# Altium PCB OPENMV4_BASE_ascii.PcbDoc
Units mm, origin at the board's own origin, x right, y up, seen from the top; angles counter-clockwise.
Board outline 35 x 44.63 mm, 2 copper layers (Top Layer, Bottom Layer); 53 components, 65 nets, 319 pads, 175 vias.
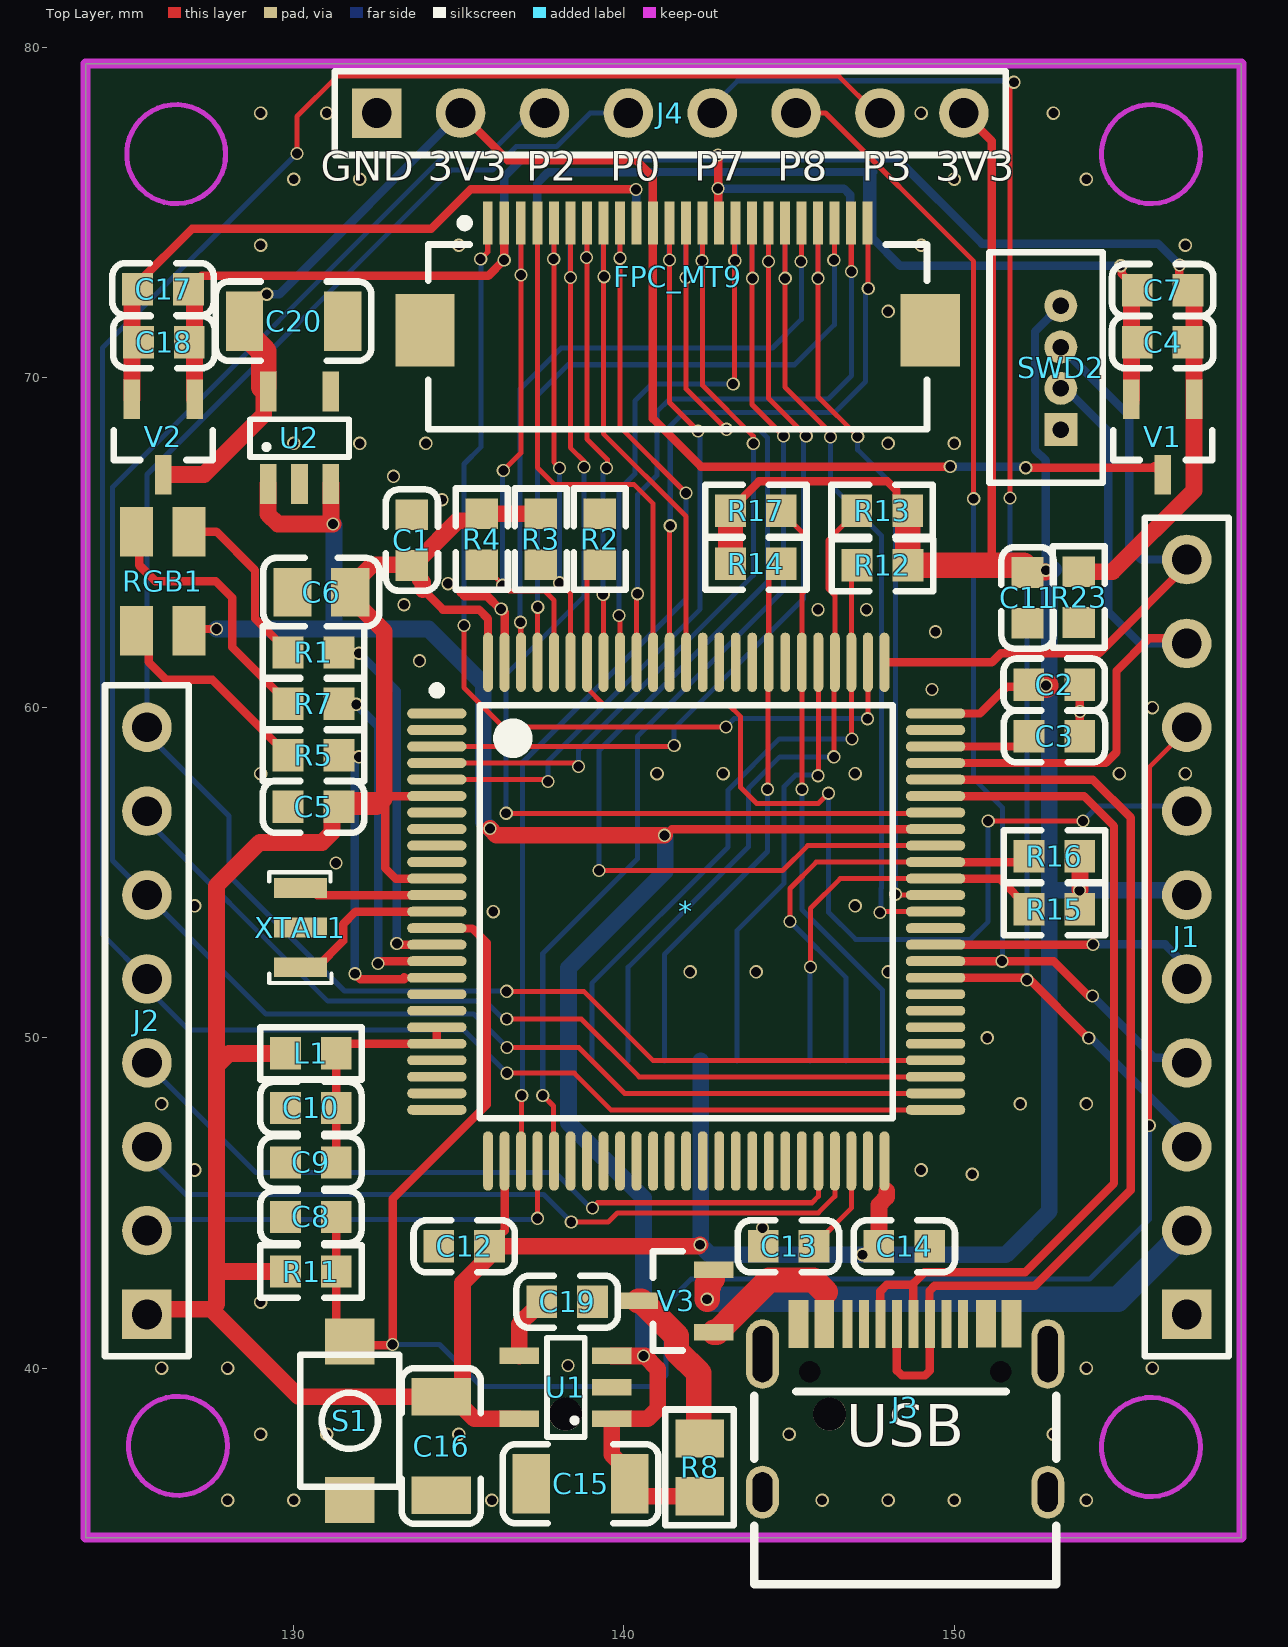
[diagram p0: Top Layer view]
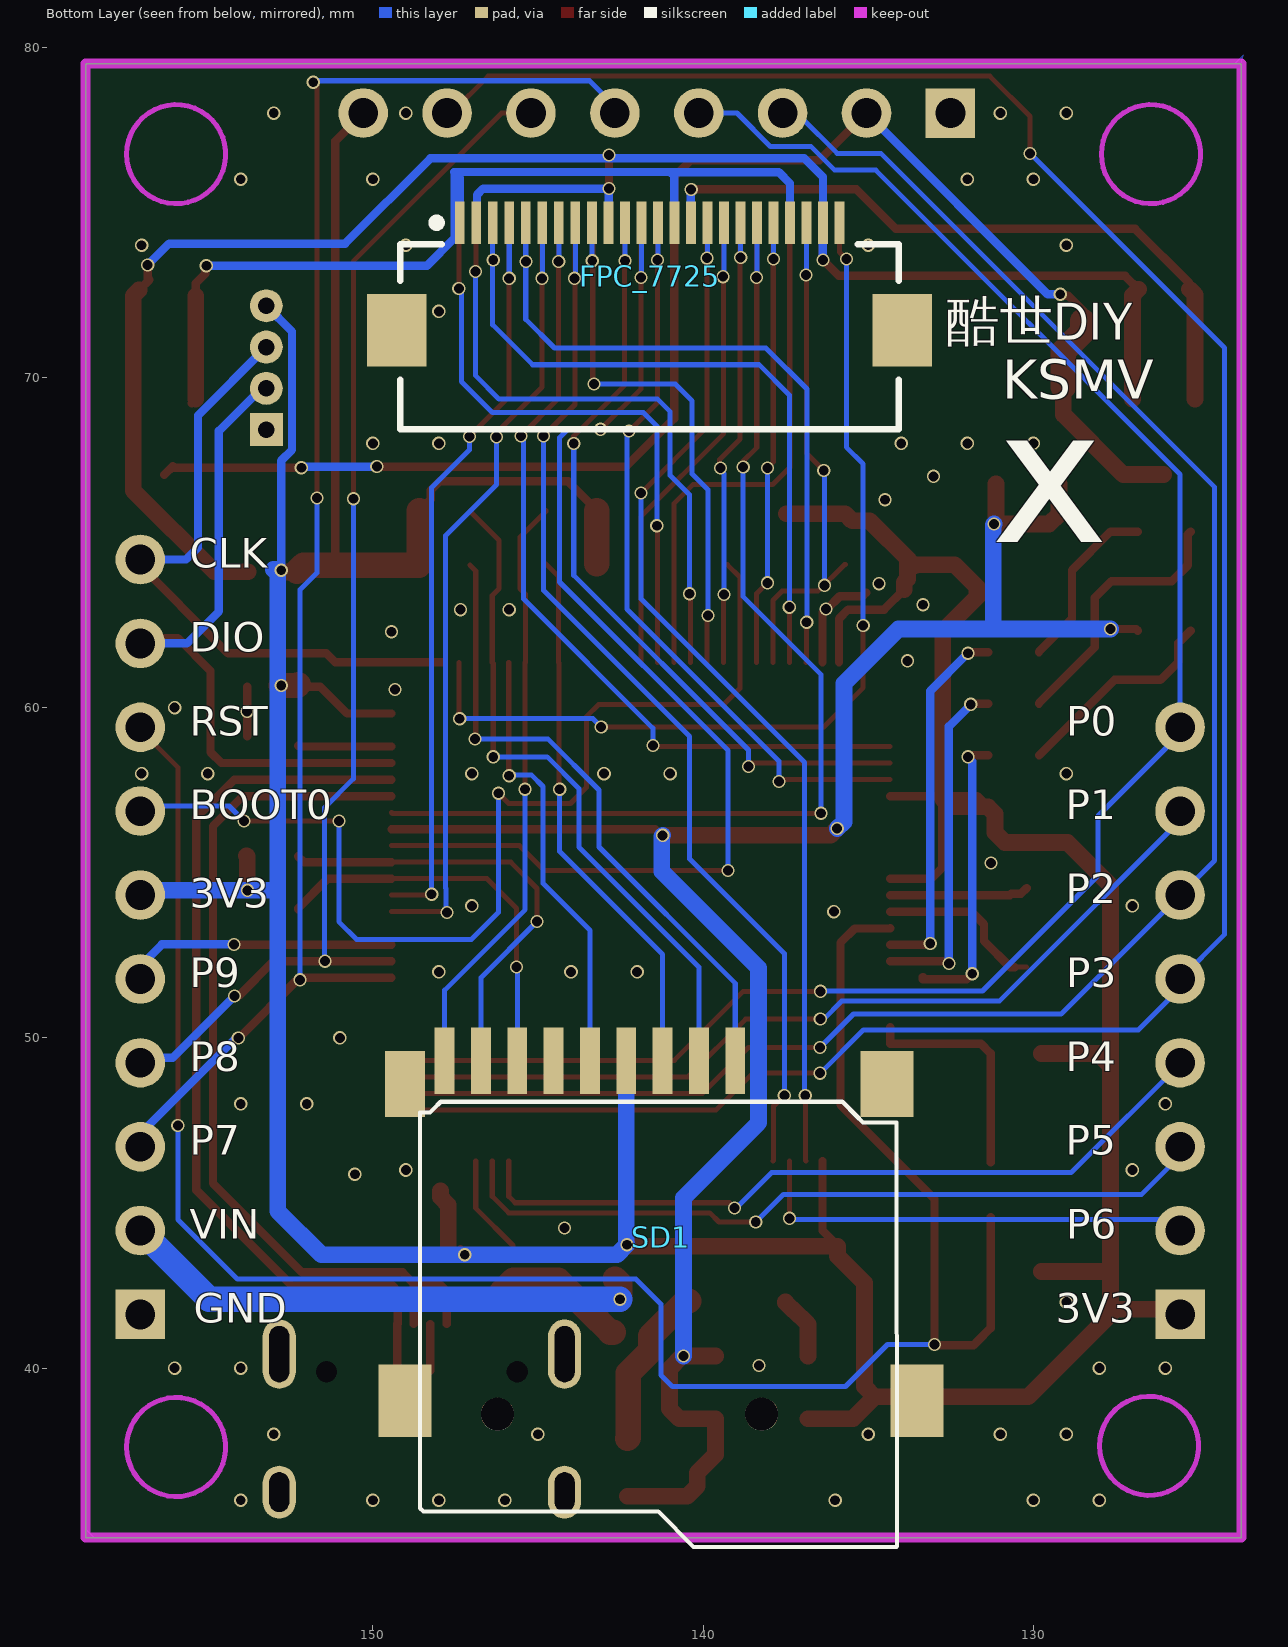
[diagram p1: Bottom Layer view, seen from below]

## Layer stack, top to bottom
Top Solder: solder mask 0.0102, Solder Resist, Dk 3.5
Top Layer: signal copper 0.0356
Dielectric 1: dielectric 0.32, FR-4, Dk 4.8
Bottom Layer: signal copper 0.0356
Bottom Solder: solder mask 0.0102, Solder Resist, Dk 3.5

## Board outline
123.698,34.869 158.698,34.869 158.698,79.502 123.698,79.502

## Design rules (kind name [scope] priority, off if disabled: settings)
AssemblyTestPointUsage [All] p0: scope1count=1 scope1_0_kind=Board scope1_0_value=Board scope2count=1 scope2_0_kind=Board scope2_0_value=Board commentlength=0
AssemblyTestpoint [All] p0: scope1count=1 scope1_0_kind=Board scope1_0_value=Board scope2count=1 scope2_0_kind=Board scope2_0_value=Board commentlength=0
Clearance [All] p0: scope1count=1 scope1_0_kind=Board scope1_0_value=Board scope2count=1 scope2_0_kind=Board scope2_0_value=Board commentlength=0 gap=0.152
Clearance [All] p1: gap=0.152 ignorepadtopadclearanceinfootprint=FALSE except(0: Arc-Hole Track-Hole SMDPad-Hole THPad-Hole Via-Hole Fill-Hole Poly-Hole Region-Hole Text-Hole)
ComponentClearance [All] p0: scope1count=1 scope1_0_kind=Board scope1_0_value=Board scope2count=1 scope2_0_kind=Board scope2_0_value=Board commentlength=0 gap=0.254 collisioncheckmode=3
DiffPairsRouting [All] p0: scope1count=1 scope1_0_kind=Board scope1_0_value=Board scope2count=1 scope2_0_kind=Board scope2_0_value=Board commentlength=0
FabricationTestPointUsage [All] p0: scope1count=1 scope1_0_kind=Board scope1_0_value=Board scope2count=1 scope2_0_kind=Board scope2_0_value=Board commentlength=0 valid=0 allowmultiple=FALSE
FabricationTestpoint [All] p0: scope1count=1 scope1_0_kind=Board scope1_0_value=Board scope2count=1 scope2_0_kind=Board scope2_0_value=Board commentlength=0 side=3 testpointundercomponent=TRUE minsize=1.016 maxsize=2.54 preferedsize=1.524 minholesize=0 maxholesize=1.016 preferedholesize=0.813 testpointgrid=0.025
FanoutControl Fanout_BGA [All] p0 off: scope1count=1 scope1_0_kind=Board scope1_0_value=Board scope2count=1 scope2_0_kind=Board scope2_0_value=Board commentlength=69 // Protel DXP Scope 1 Expression Was: IsBGA   Fanout_BGA (Default Rule)
FanoutControl Fanout_LCC [All] p0 off: scope1count=1 scope1_0_kind=Board scope1_0_value=Board scope2count=1 scope2_0_kind=Board scope2_0_value=Board commentlength=69 // Protel DXP Scope 1 Expression Was: IsLCC   Fanout_LCC (Default Rule)
FanoutControl Fanout_SOIC [All] p0 off: scope1count=1 scope1_0_kind=Board scope1_0_value=Board scope2count=1 scope2_0_kind=Board scope2_0_value=Board commentlength=71 // Protel DXP Scope 1 Expression Was: IsSOIC   Fanout_SOIC (Default Rule)
FanoutControl Fanout_Small [All] p0 off: scope1count=1 scope1_0_kind=Board scope1_0_value=Board scope2count=1 scope2_0_kind=Board scope2_0_value=Board commentlength=84 // Protel DXP Scope 1 Expression Was: (CompPinCount < 5)   Fanout_Small (Default Rule)
FanoutControl Fanout_Default [All] p0: scope1count=1 scope1_0_kind=Board scope1_0_value=Board scope2count=1 scope2_0_kind=Board scope2_0_value=Board commentlength=30 // Fanout_Default (Default Rule)
Height [All] p0: scope1count=1 scope1_0_kind=Board scope1_0_value=Board scope2count=1 scope2_0_kind=Board scope2_0_value=Board commentlength=0
HoleSize [All] p0: scope1count=1 scope1_0_kind=Board scope1_0_value=Board scope2count=1 scope2_0_kind=Board scope2_0_value=Board commentlength=0 absolutevalues=TRUE maxlimit=2.54 minlimit=0.025 maxpercent=80.000 minpercent=20.000
HoleToHoleClearance [All] p0: scope1count=1 scope1_0_kind=Board scope1_0_value=Board scope2count=1 scope2_0_kind=Board scope2_0_value=Board commentlength=0
LayerPairs [All] p0: scope1count=1 scope1_0_kind=Board scope1_0_value=Board scope2count=1 scope2_0_kind=Board scope2_0_value=Board commentlength=0 enforce=TRUE
MinimumSolderMaskSliver [All] p0: scope1count=1 scope1_0_kind=Board scope1_0_value=Board scope2count=1 scope2_0_kind=Board scope2_0_value=Board commentlength=0
NetAntennae [All] p0: scope1count=1 scope1_0_kind=Board scope1_0_value=Board scope2count=1 scope2_0_kind=Board scope2_0_value=Board commentlength=0
PasteMaskExpansion [All] p0: scope1count=1 scope1_0_kind=Board scope1_0_value=Board scope2count=1 scope2_0_kind=Board scope2_0_value=Board commentlength=0 expansion=0
PlaneClearance [All] p0: scope1count=1 scope1_0_kind=Board scope1_0_value=Board scope2count=1 scope2_0_kind=Board scope2_0_value=Board commentlength=0 clearance=0.508
PlaneConnect [All] p0: scope1count=1 scope1_0_kind=Board scope1_0_value=Board scope2count=1 scope2_0_kind=Board scope2_0_value=Board commentlength=0 planeconnectstyle=Relief reliefexpansion=0.508 reliefentries=4 reliefconductorwidth=0.254 reliefairgap=0.254
PolygonConnect [All] p0: scope1count=1 scope1_0_kind=Board scope1_0_value=Board scope2count=1 scope2_0_kind=Board scope2_0_value=Board commentlength=0 connectstyle=Relief reliefconductorwidth=0.254 reliefentries=4 polygonreliefangle="90 Angle"
PolygonConnect [All] p1: connectstyle=Relief reliefconductorwidth=0.254 reliefentries=4 polygonreliefangle="90 Angle" airgapwidth=0.254
RoutingCorners [All] p0: scope1count=1 scope1_0_kind=Board scope1_0_value=Board scope2count=1 scope2_0_kind=Board scope2_0_value=Board commentlength=0 cornerstyle=45-Degree minsetback=2.54 maxsetback=2.54
RoutingLayers [All] p0: scope1count=1 scope1_0_kind=Board scope1_0_value=Board scope2count=1 scope2_0_kind=Board scope2_0_value=Board commentlength=0 top layer=Automatic bottom layer=Automatic
RoutingPriority [All] p0: scope1count=1 scope1_0_kind=Board scope1_0_value=Board scope2count=1 scope2_0_kind=Board scope2_0_value=Board commentlength=0
RoutingTopology [All] p0: scope1count=1 scope1_0_kind=Board scope1_0_value=Board scope2count=1 scope2_0_kind=Board scope2_0_value=Board commentlength=0 topology=Shortest
RoutingVias [All] p0: scope1count=1 scope1_0_kind=Board scope1_0_value=Board scope2count=1 scope2_0_kind=Board scope2_0_value=Board commentlength=0 holewidth=0.3 width=0.4 viastyle="Through Hole" minholewidth=0.3 minwidth=0.4 maxholewidth=0.3 maxwidth=0.4
RoutingVias [All] p1: holewidth=0.3 width=0.4 viastyle="Through Hole" minholewidth=0.3 minwidth=0.4 maxholewidth=0.3 maxwidth=0.4
ShortCircuit [All] p0: scope1count=1 scope1_0_kind=Board scope1_0_value=Board scope2count=1 scope2_0_kind=Board scope2_0_value=Board commentlength=0 allowed=FALSE
SilkToBoardRegionClearance [All] p0: scope1count=1 scope1_0_kind=Board scope1_0_value=Board scope2count=1 scope2_0_kind=Board scope2_0_value=Board commentlength=0
SilkToSilkClearance [All] p0: scope1count=1 scope1_0_kind=Board scope1_0_value=Board scope2count=1 scope2_0_kind=Board scope2_0_value=Board commentlength=0
SilkToSolderMaskClearance [All] p0 off: scope1count=1 scope1_0_kind=Board scope1_0_value=Board scope2count=1 scope2_0_kind=Board scope2_0_value=Board commentlength=44 // Protel DXP Scope 1 Expression Was: IsPad
SolderMaskExpansion [All] p0: scope1count=1 scope1_0_kind=Board scope1_0_value=Board scope2count=1 scope2_0_kind=Board scope2_0_value=Board commentlength=0 expansion=0.102
SolderMaskExpansion [All] p1: expansion=0.102 istentingtop=FALSE
UnRoutedNet [All] p0: scope1count=1 scope1_0_kind=Board scope1_0_value=Board scope2count=1 scope2_0_kind=Board scope2_0_value=Board commentlength=0
UnpouredPolygon [All] p0: scope1count=1 scope1_0_kind=Board scope1_0_value=Board scope2count=1 scope2_0_kind=Board scope2_0_value=Board commentlength=0
Width [All] p0: scope1count=1 scope1_0_kind=Board scope1_0_value=Board scope2count=1 scope2_0_kind=Board scope2_0_value=Board commentlength=0 maxlimit=0.762 minlimit=0.152 preferedwidth=0.254
Width [All] p1: maxlimit=0.762 minlimit=0.152 preferedwidth=0.254
30 further rules are at their usual default settings.

## Components (designator, comment, footprint, x,y, rotation, side; value= is the part's Value field where it differs from the comment)
* "STM32H743VIT6" "LQFP100 14x14_N" 141.884,53.823 r270 top
C1 "104" LC-0603_C 133.579,65.075 r270 top
C2 "104" LC-0603_C 153.028,60.697 r180 top
C3 "2.2uf" LC-0603_C 153.035,59.131 r0 top
C4 "104" 0603_C 156.312,71.069 r0 top
C5 "104" LC-0603_C 130.598,56.998 r0 top
C6 "10uF" LC-0805_C 130.835,63.5 r0 top
C7 "106" 0603_C 156.312,72.644 r0 top
C8 "104" LC-0603_C 130.522,44.577 r0 top
C9 "104" LC-0603_C 130.522,46.228 r180 top
C10 "10uF" LC-0603_C 130.522,47.879 r180 top
C11 "104" LC-0603_C 152.22,63.322 r90 top
C12 "104" LC-0603_C 135.161,43.688 r0 top
C13 "2.2uf" LC-0603_C 144.983,43.688 r180 top
C14 "104" LC-0603_C 148.488,43.688 r180 top
C15 "47uF" LC-1206_C 138.684,36.5 r180 top
C16 "47uF" LC-1206_C 134.468,37.643 r270 top
C17 "104" 0603_C 126.043,72.669 r0 top
C18 "106" 0603_C 126.068,71.069 r0 top
C19 "104" LC-0603_C 138.278,42.012 r180 top
C20 "47uF" LC-1206_C 129.997,71.704 r0 top
FPC_7725 "FPC_24" FPC_24 141.63,71.323 r180 bottom
FPC_MT9 "FPC_24" FPC_24 141.615,71.316 r0 top
J1 "CON10" HDR1X10 157.041,41.626 r90 top
J2 "CON8" HDR1X8 125.556,41.626 r90 top
J3 "USB type C" "USB Type-C-16Pin_A" 148.514,36.246 r0 top
J4 "Header 10" HDR1X8 132.512,78.003 r0 top
L1 "180nH" LC-0603_L 130.522,49.53 r0 top
R1 "1K" 0603_R 130.598,61.672 r0 top
R2 "10K" LC-0603_R 139.268,65.1 r90 top
R3 "10K" LC-0603_R 137.482,65.1 r90 top
R4 "10K" LC-0603_R 135.695,65.1 r270 top
R5 "1K" 0603_R 130.598,58.556 r180 top
R7 "1K" 0603_R 130.598,60.114 r180 top
R8 "1A保险丝" LC-0805_L 142.291,36.994 r90 top
R11 "10K" LC-0603_R 130.522,42.926 r0 top
R12 "10K" LC-0603_R 147.828,64.313 r180 top
R13 "10K" LC-0603_R 147.82,65.964 r180 top
R14 "10K" LC-0603_R 143.993,64.355 r0 top
R15 "10K" LC-0603_R 153.035,53.899 r180 top
R16 "10K" LC-0603_R 153.035,55.499 r180 top
R17 "10K" LC-0603_R 143.993,65.964 r0 top
R23 "0" LC-0603_R 153.772,63.348 r90 top
RGB1 "RGB_LED" LED_3528_RGB 126.035,63.83 r270 top
S1 "RST" KEY_1 131.699,38.405 r90 top
SD1 "micro SD" TF卡座 141.532,41.942 r270 bottom
SWD2 "Header 4" "SIP 1.25" 153.202,70.294 r90 top (schematic designator SWD1)
U1 "MIC5219" SOT23-5N 138.227,39.421 r90 top
U2 "MIC5219" SOT23-5N 130.175,68.174 r0 top
V1 "XC6206 2V8" SOT23-3N 156.312,68.199 r180 top
V2 "XC6206 1V5" SOT23-3N 126.053,68.199 r180 top
V3 "BAT54C" SOT23-3N 141.58,42.037 r90 top
XTAL1 "12M" XTAL-3215-3P 130.2,53.34 r270 top

## Footprints (in the part's own frame and the unit in brackets; to place one, negate y for a bottom-side part, rotate by r counter-clockwise, add the part's x,y. Pads: shape width x height; smd on the part's side, far side on the other; paste and mask are expansions set on the pad)
0603_C [mm]
  rect 0.93x0.98 smd: 1(-0.77,0) 2(0.77,0)
  silkscreen extent -1.53,-0.79 1.54,0.79
0603_R [mm]
  rect 0.93x0.98 smd: 1(-0.77,0) 2(0.77,0)
  silkscreen extent -1.53,-0.79 1.54,0.79
FPC_24 [mm]
  rect 0.3x1.3 smd: 1(-5.739,3.359) 2(-5.239,3.359) 3(-4.739,3.359) 4(-4.239,3.359) 5(-3.739,3.359) 6(-3.239,3.359) 7(-2.739,3.359) 8(-2.239,3.359) 9(-1.739,3.359) 10(-1.239,3.359) 11(-0.739,3.359) 12(-0.239,3.359) 13(0.261,3.359) 14(0.761,3.359) 15(1.261,3.359) 16(1.761,3.359) 17(2.261,3.359) 18(2.761,3.359) 19(3.261,3.359) 20(3.761,3.359) 21(4.261,3.359) 22(4.761,3.359) 23(5.261,3.359) 24(5.761,3.359)
  rect 1.8x2.2 smd: 25(-7.639,0.109) 26(7.661,0.109)
  silkscreen extent -7.54,-2.89 7.56,3.48
HDR1X8 [mm] "Connector; Header; 8 Position"
  rect 1.5x1.5 hole 0.9: 1(0,0)
  round 1.5 hole 0.9: 2(2.54,0) 3(5.08,0) 4(7.62,0) 5(10.16,0) 6(12.7,0) 7(15.24,0) 8(17.78,0)
  silkscreen extent -1.27,-1.27 19.05,1.27
HDR1X10 [mm] "Connector; Header; 10 Position"
  rect 1.5x1.5 hole 0.9: 1(0,0)
  round 1.5 hole 0.9: 2(2.54,0) 3(5.08,0) 4(7.62,0) 5(10.16,0) 6(12.7,0) 7(15.24,0) 8(17.78,0) 9(20.32,0) 10(22.86,0)
  silkscreen extent -1.27,-1.27 24.13,1.27
KEY_1 [mm]
  rect 1.4x1.5 smd: 1(-2.4,0) 2(2.4,0)
  silkscreen extent -2.01,-1.5 2,1.5
LC-0603_C [mm]
  rect 0.93x0.98 smd: 1(-0.77,0) 2(0.77,0)
  silkscreen extent -1.53,-0.79 1.54,0.79
LC-0603_L [mm]
  rect 0.93x0.98 smd: 1(-0.77,0) 2(0.77,0)
  silkscreen extent -1.53,-0.79 1.54,0.79
LC-0603_R [mm]
  rect 0.93x0.98 smd: 1(-0.77,0) 2(0.77,0)
  silkscreen extent -1.53,-0.79 1.54,0.79
LC-0805_C [mm]
  rect 1.16x1.47 smd: 1(-0.875,0) 2(0.875,0)
  silkscreen extent -1.76,-1.04 1.76,1.04
LC-0805_L [mm]
  rect 1.16x1.47 smd: 1(-0.875,0) 2(0.875,0)
  silkscreen extent -1.76,-1.04 1.76,1.03
LC-1206_C [mm]
  rect 1.13x1.8 smd: 1(-1.49,0) 2(1.49,0)
  silkscreen extent -2.36,-1.2 2.35,1.2
LED_3528_RGB [mm]
  rect 1.5x1 smd: 1(1.5,-0.8) 2(-1.5,-0.8) 3(-1.5,0.8) 4(1.5,0.8)
"LQFP100 14x14_N" [mm] "100脚，体宽14x14mm，脚距0.5mm"
  oval 0.3x1.8 smd: 1(-6,-7.55) 2(-5.5,-7.55) 3(-5,-7.55) 4(-4.5,-7.55) 5(-4,-7.55) 6(-3.5,-7.55) 7(-3,-7.55) 8(-2.5,-7.55) 9(-2,-7.55) 10(-1.5,-7.55) 11(-1,-7.55) 12(-0.5,-7.55) 13(0,-7.55) 14(0.5,-7.55) 15(1,-7.55) 16(1.5,-7.55) 17(2,-7.55) 18(2.5,-7.55) 19(3,-7.55) 20(3.5,-7.55) 21(4,-7.55) 22(4.5,-7.55) 23(5,-7.55) 24(5.5,-7.55) 25(6,-7.55) 51(6,7.55) 52(5.5,7.55) 53(5,7.55) 54(4.5,7.55) 55(4,7.55) 56(3.5,7.55) 57(3,7.55) 58(2.5,7.55) 59(2,7.55) 60(1.5,7.55) 61(1,7.55) 62(0.5,7.55) 63(0,7.55) 64(-0.5,7.55) 65(-1,7.55) 66(-1.5,7.55) 67(-2,7.55) 68(-2.5,7.55) 69(-3,7.55) 70(-3.5,7.55) 71(-4,7.55) 72(-4.5,7.55) 73(-5,7.55) 74(-5.5,7.55) 75(-6,7.55)
  oval 1.8x0.3 smd: 26(7.55,-6) 27(7.55,-5.5) 28(7.55,-5) 29(7.55,-4.5) 30(7.55,-4) 31(7.55,-3.5) 32(7.55,-3) 33(7.55,-2.5) 34(7.55,-2) 35(7.55,-1.5) 36(7.55,-1) 37(7.55,-0.5) 38(7.55,0) 39(7.55,0.5) 40(7.55,1) 41(7.55,1.5) 42(7.55,2) 43(7.55,2.5) 44(7.55,3) 45(7.55,3.5) 46(7.55,4) 47(7.55,4.5) 48(7.55,5) 49(7.55,5.5) 50(7.55,6) 76(-7.55,6) 77(-7.55,5.5) 78(-7.55,5) 79(-7.55,4.5) 80(-7.55,4) 81(-7.55,3.5) 82(-7.55,3) 83(-7.55,2.5) 84(-7.55,2) 85(-7.55,1.5) 86(-7.55,1) 87(-7.55,0.5) 88(-7.55,0) 89(-7.55,-0.5) 90(-7.55,-1) 91(-7.55,-1.5) 92(-7.55,-2) 93(-7.55,-2.5) 94(-7.55,-3) 95(-7.55,-3.5) 96(-7.55,-4) 97(-7.55,-4.5) 98(-7.55,-5) 99(-7.55,-5.5) 100(-7.55,-6)
  silkscreen extent -6.82,-7.67 6.25,6.25
"SIP 1.25" [mm]
  rect 1x1 hole 0.5: 1(-1.875,-0.025)
  round 1 hole 0.5: 3(0.625,-0.025) 3(1.875,-0.025) ""(-0.625,-0.025)
  silkscreen extent -3.48,-1.3 3.5,2.13
SOT23-3N [mm] "3x1.3x1mm(长宽高)"
  rect 0.5x1.2 smd: 1(-0.95,-1.143) 2(0.95,-1.143) 3(0,1.143)
  silkscreen extent -1.5,-0.2 1.5,0.7
SOT23-5N [mm] "3x1.6x1.1mm(长宽高)"
  rect 0.5x1.2 smd: 1(-0.95,-1.4) 2(0,-1.4) 3(0.95,-1.4) 4(0.95,1.4) 5(-0.95,1.4)
  silkscreen extent -1.5,-0.58 1.5,0.56
TF卡座 [mm]
  round 1 hole 1 unplated: 0(3.334,-4.696) 0(3.334,3.305)
  rect 2x0.6 smd: 1(-7.366,2.505) 2(-7.366,1.405) 3(-7.366,0.305) 4(-7.366,-0.795) 5(-7.366,-1.895) 6(-7.366,-2.995) 7(-7.366,-4.095) 8(-7.366,-5.195) 9(-7.366,-6.295)
  rect 2x1.2 smd: 10(-6.666,-7.495)
  rect 2.2x1.6 smd: 11(2.934,-7.495) 12(2.934,8.005)
  rect 2x1.6 smd: 13(-6.666,7.105)
  silkscreen extent -6.12,-7.04 7.35,7.4
"USB Type-C-16Pin_A" [mm]
  round 0 hole 0.65: 0(-2.89,3.65) 0(2.89,3.65)
  oval 1x1.6 hole 0.6 slot 1.2 at 90 deg: 1(-4.32,0) 1(4.32,0)
  oval 1x2.1 hole 0.6 slot 1.7 at 90 deg: 1(-4.32,4.18) 1(4.32,4.18)
  rect 0.3x1.45 smd: A1(-3.375,5.092) A4(-2.6,5.092) A5(-1.25,5.092) A6(-0.25,5.092) A7(0.25,5.092) A8(-1.75,5.092) A9(2.6,5.1) A12(3.375,5.1) B1(3.075,5.1) B4(2.3,5.1) B5(1.75,5.092) B6(0.75,5.092) B7(-0.75,5.092) B8(1.25,5.092) B9(-2.3,5.092) B12(-3.075,5.092)
  silkscreen extent -4.57,-2.79 4.57,3.05
XTAL-3215-3P [mm]
  rect 0.6x1.6 smd: 1(-1.2,0) 2(0,0) 3(1.2,0)
  silkscreen extent -1.68,-0.94 1.68,0.94

## Part data
C1 C2 C3 C4 C5 C6 C7 C8 C9 C10 C11 C12 C13 C14 C17 C18: library part CAP
C15 C16 C20: library part "Cap Pol1", "Polarized Capacitor (Radial)"
C19: library part CAP104
J3: library part USB_C
J4: "Header, 10-Pin"
L1: library part Inductor
R1 R5 R7 R8: library part Res2, "Resistor"
R2 R3 R4 R11 R12 R13 R14 R15 R16 R17 R23: library part RES
RGB1: "三色高亮LED"
S1: library part SW-PB, "Switch"
SWD2: "Header, 4-Pin"
U1 U2: "3.3V 降压芯片"
V1 V2: library part XC6206P332MR, "低压差线性稳压芯片"
XTAL1: library part XTAL_3P

## Via types
v1: diameter 0.4, hole 0.3, Top Layer to Bottom Layer, 122 vias
v2: diameter 0.41, hole 0.3, Top Layer to Bottom Layer, 53 vias

## Nets (pads, with @x,y where several pads share a name; then routed paths per layer and width w, separated by ;. In a path a pad name is that pad's centre, name@x,y a point inside that pad or via, vN(x,y) a via of type N, cw(c..) or ccw(c..) an arc to the next point about the centre after c; other vN are vias at no path point)
1V5: C17.1 C18.1 FPC_7725.15 V2.2 | length 20.9
  Top Layer w0.254: C17.1 125.273,72.851 126.92,74.498 134.163,74.498 135.357,75.692 v1(140.36,75.692)
  Top Layer w0.508: V2.2 125.107,69.346 125.107,72.504 C17.1
  Bottom Layer w0.254: v1(140.36,75.692) 140.37,75.683 FPC_7725.15
2V8: C4.1 C7.1 FPC_7725.1 FPC_7725.14 FPC_7725.21 V1.2 | length 28.9
  Top Layer w0.254: v1(155.042,73.381) 155.07,73.353 155.07,73.141 155.366,72.845 C7.1@155.366,72.468 ; V1.2 V1.2@155.485,69.219
  Top Layer w0.508: V1.2 155.366,69.346 C7.1@155.366,72.468
  Bottom Layer w0.254: FPC_7725.21 137.37,75.876 137.704,76.211 140.981,76.211 ; FPC_7725.14@140.882,74.67 FPC_7725.14 140.87,76.1 140.981,76.211 ; FPC_7725.1 147.37,76.047 147.523,76.2 ; v1(155.042,73.381) 148.361,73.381 147.523,74.219 147.523,76.2 ; 140.981,76.211 140.989,76.219 147.543,76.219 147.523,76.2
3V3: *.6 *.11 *.27 *.50 *.75 *.100 C1.2 C2.2 C5.2 C6.2 C11.2 C12.2 C14.2 C16.1 J1.6 J2.1 J4.8 L1.1 R3.2 R4.1 R11.1 R12.1 R13.1 R14.1 R15.1 R16.1 R17.1 SD1.4 SWD2.3@153.227,72.169 U1.5 | length 160.3
  Top Layer w0.152: v1(147.218,43.434) 147.218,43.523 147.348,43.652 147.515,43.485 C14.2
  Top Layer w0.254: C5.2 131.693,57.322 132.74,57.322 *.6 ; 132.74,57.226 132.766,57.201 132.766,55.143 133.087,54.822 *.11 ; 133.909,63.576 134.518,62.967 135.611,62.967 135.884,62.693 *.100 ; C12.2 135.931,43.713 136.384,44.166 *.27 ; R17.1 143.223,65.989 144.087,66.853 147.98,66.853 148.252,66.581 148.252,66.302 R13.1 ; *.75 150.78,59.822 151.587,60.63 C2.2@152.265,60.63 ; J4.8 151.136,77.159 151.136,64.313
  Top Layer w0.508: J2.1@125.12,41.783 127.508,41.783 ; R11.1 127.711,42.926 127.66,42.977 ; L1.1 128.041,49.53 127.66,49.149 ; C6.2@131.648,63.407 132.74,62.315 132.74,57.322 ; C6.2 131.71,63.655 132.386,64.33 133.553,64.33 C1.2 ; 132.74,57.226 132.512,56.998 C5.2 131.157,56.787 131.157,56.215 130.86,55.918 128.968,55.918 127.66,54.61 127.66,49.149 ; 133.909,63.576 133.909,63.796 133.815,63.89 133.815,64.399 133.756,64.457 134.958,65.659 135.484,65.659 R4.1 R3.2 ; U1.5 135.465,38.471 C16.1@134.803,39.133 ; v1(142.306,43.738) 142.256,43.688 C12.2 135.931,43.399 135.114,42.581 135.114,39.444 C16.1@134.803,39.133 ; C14.2 147.718,44.94 147.955,45.177 147.955,45.364 ; C11.2 152.237,64.11 v1@152.771,64.11 ; v1@153.805,54.468 R16.1 R16.1@153.822,55.516 ; J1.6@156.965,54.498 J1.6@157.041,54.498 ; 127.508,41.783 127.66,41.935 127.66,42.977 ; 127.508,41.783 130.158,39.133 C16.1 C16.1@134.803,39.133 ; 127.66,42.977 127.66,49.149
  Top Layer w0.762: R14.1 R17.1 ; R13.1 148.594,65.96 148.594,64.317 R12.1 151.136,64.313 152.104,64.313 C11.2@152.299,64.118 ; C2.2 152.283,60.671 v1(152.774,60.671)
  Bottom Layer w0.254: v1(152.773,64.161) 152.773,67.478 152.447,67.803 152.447,71.39 SWD2.3@153.227,72.169
  Bottom Layer w0.508: SD1.4 142.327,43.759 v1(142.306,43.738) 142.61,43.434 v1(147.218,43.434) 151.562,43.434 152.877,44.749 152.877,54.468 ; 153.01,64.187 152.877,64.187 152.877,54.468 ; J1.6@157.277,54.483 157.262,54.468 v1(153.797,54.468) 152.877,54.468
3V3_SENSOR: C20.1 FPC_MT9.11 J4.2 U2.5 V1.3 V2.3 | length 46.3
  Top Layer w0.254: C20.1 128.507,72.039 128.945,72.477 129.105,72.477 129.145,72.517 v1(129.184,72.517) ; J4.2 136.474,76.581 140.36,76.581 140.876,76.066 FPC_MT9.11 140.876,68.75 142.328,67.298 v1(149.879,67.298) ; v1(152.166,67.263) 156.01,67.263 156.058,67.31 V1.3
  Top Layer w0.508: V2.3 127.279,67.056 129.094,68.871 U2.5@129.094,69.705
  Top Layer w0.762: C20.1 128.507,71.369 129.094,70.782 U2.5@129.094,69.705
  Bottom Layer w0.254: v1(129.184,72.517) 129.565,72.517 J4.2 ; v1(149.879,67.298) 152.131,67.298 v1(152.166,67.263)
5V_IN: J3.A4 J3.A9 J3.B4 J3.B9 V3.1 | length 4.2
  Top Layer w0.762: V3.1 142.812,41.087 143.434,41.709 ; 143.434,41.71 144.388,42.665 145.741,42.665 146.101,42.305
ALL_IN: R8.2 V3.3 | length 5
  Top Layer w0.762: V3.3 140.525,42.037 141.589,40.972 141.589,40.525 142.265,39.849 142.265,37.894 R8.2
BOOT0: *.94 J1.7 R2.1 | length 32.5
  Top Layer w0.152: R2.1 138.884,63.946 *.94 138.884,60.587 139.375,60.096 143.163,60.096 143.535,59.724 143.535,57.582 144.018,57.099 145.887,57.099 v1(146.196,57.408) ; v1(151.028,56.566) v1(153.899,56.566)
  Bottom Layer w0.152: v1(146.196,57.408) 146.196,53.804 147.015,52.984 150.495,52.984 151.028,53.518 v1(151.028,56.566) ; v1(153.899,56.566) 154.356,57.023 J1.7@157.277,57.023
DAC: *.29 J2.2 | length 14.1
  Top Layer w0.152: v1(137.38,44.536) 137.384,44.54 *.29
  Bottom Layer w0.152: J2.2@125.12,44.323 125.302,44.504 137.348,44.504 v1(137.38,44.536)
"DCMI CLK": *.67 FPC_7725.12 FPC_MT9.13 | length 35.5
  Top Layer w0.152: v1(139.243,55.067) 144.805,55.067 145.561,55.822 *.67 ; FPC_MT9.13 141.876,69.655 v1(143.104,68.428)
  Bottom Layer w0.152: v1(139.243,55.067) 139.243,58.699 144.345,63.802 144.345,68.173 144.091,68.428 v1(143.104,68.428) ; FPC_7725.12 141.87,73.04 v1(141.884,73.025)
"DCMI D0": *.63 FPC_7725.6 FPC_MT9.19 | length 25.5
  Top Layer w0.152: FPC_MT9.19 144.876,69.703 146.253,68.326 v1(146.253,68.199) ; v1(147.753,53.8) 147.776,53.823 *.63
  Bottom Layer w0.152: FPC_7725.6 144.87,73.011 v1(144.882,73) ; v1(146.253,68.199) 146.253,66.751 147.799,65.205 147.799,54.536 147.789,54.527 147.789,53.836 v1(147.753,53.8)
"DCMI D1": *.64 FPC_7725.4 FPC_MT9.21 | length 24.2
  Top Layer w0.152: FPC_MT9.21 145.876,69.414 v1(147.076,68.214) ; v1(148.218,54.349) 148.245,54.322 *.64
  Bottom Layer w0.152: FPC_7725.4 145.87,73.002 v1(145.872,73) ; v1(147.076,68.214) 147.076,67.808 148.218,66.666 v1(148.218,54.349)
"DCMI D2": *.97 FPC_7725.3 FPC_MT9.22 | length 22.2
  Top Layer w0.152: *.97 137.384,63.039 v1(137.389,63.043) ; v1(146.355,73.558) 146.376,73.579 FPC_MT9.22
  Bottom Layer w0.152: v1(137.389,63.043) 137.389,69.469 138.303,70.383 145.161,70.383 146.37,71.592 FPC_7725.3
"DCMI D3": *.98 FPC_7725.5 FPC_MT9.20 | length 21.8
  Top Layer w0.152: v1(136.864,62.586) 136.874,62.575 136.874,61.383 *.98 ; v1(145.364,73.508) 145.376,73.519 FPC_MT9.20
  Bottom Layer w0.152: v1(136.864,62.586) 136.855,62.594 136.855,69.647 138.1,70.891 144.501,70.891 145.37,71.761 FPC_7725.5
"DCMI D4": *.3 FPC_7725.7 FPC_MT9.18 | length 26.3
  Top Layer w0.152: *.3 141.485,58.822 v1(141.52,58.858) ; FPC_MT9.18 144.376,69.365 v1(145.517,68.224)
  Bottom Layer w0.152: v1(141.52,58.858) 141.52,59.377 145.437,63.294 145.437,68.145 v1(145.517,68.224) ; FPC_7725.7 144.37,73.511 v1(144.374,73.508)
"DCMI D5": *.92 FPC_7725.9 FPC_MT9.16 | length 17.4
  Top Layer w0.152: v1(139.852,62.789) 139.884,62.757 *.92 ; v1(143.307,69.799) 143.341,69.834 143.341,74.64 FPC_MT9.16
  Bottom Layer w0.152: v1(139.852,62.789) 139.852,66.599 140.335,67.081 140.335,69.291 140.843,69.799 v1(143.307,69.799) ; v1(143.358,73.533) 143.37,73.545 FPC_7725.9
"DCMI D6": *.4 FPC_7725.11 FPC_MT9.14 | length 24.9
  Top Layer w0.152: *.4 138.52,58.322 v1(138.627,58.215) ; FPC_MT9.14 142.376,69.762 143.916,68.221 v1(143.916,67.996)
  Bottom Layer w0.152: v1(138.627,58.215) 138.627,58.719 143.916,64.008 v1(143.916,67.996) ; v1(142.367,73.533) 142.37,73.536 FPC_7725.11 FPC_7725.11@142.433,74.619
"DCMI D7": *.5 FPC_7725.13 FPC_MT9.12 | length 23.8
  Top Layer w0.152: *.5 137.64,57.822 v1(137.701,57.761) ; FPC_MT9.12 141.376,69.241 v1(142.24,68.377)
  Bottom Layer w0.152: v1(137.701,57.761) 137.701,58.377 142.306,62.982 142.306,68.311 v1(142.24,68.377) ; FPC_7725.13@141.348,74.66 FPC_7725.13 141.37,73.565 v1(141.376,73.558)
"DCMI HSYNC": *.28 FPC_7725.16 FPC_MT9.9 | length 32.4
  Top Layer w0.152: *.28 136.895,46.283 136.895,48.249 v1(136.906,48.26) ; FPC_MT9.9 139.876,68.503 v1(141.877,66.502)
  Bottom Layer w0.152: v1(136.906,48.26) 136.925,48.279 136.925,58.337 141.877,63.29 v1(141.877,66.502) ; FPC_7725.16 139.87,73.617 v1(139.878,73.609)
"DCMI PCLK": *.30 FPC_7725.8 FPC_MT9.17 | length 33.7
  Top Layer w0.152: v1(137.541,48.26) 137.865,47.936 137.865,46.292 *.30 ; FPC_MT9.17 143.876,69.179 v1(144.831,68.224)
  Bottom Layer w0.152: v1(137.541,48.26) 137.541,52.553 140.411,55.423 140.411,59.131 144.831,63.551 v1(144.831,68.224) ; FPC_7725.8 143.87,73.021 v1(143.891,73)
"DCMI PWDN": *.88 FPC_7725.17 FPC_MT9.8 | length 16
  Top Layer w0.152: FPC_MT9.8 139.376,68.295 141.884,65.786 *.88
  Bottom Layer w0.152: FPC_7725.17 139.37,73.076 v1(139.395,73.05)
"DCMI RST": *.69 FPC_7725.19 FPC_MT9.6 | length 33.7
  Top Layer w0.152: v1(136.434,56.802) 136.441,56.794 149.406,56.794 *.69 ; FPC_MT9.6 138.376,67.872 138.811,67.437 138.811,67.31 v1(138.786,67.285)
  Bottom Layer w0.152: v1(136.434,56.802) 136.434,61.011 138.786,63.362 v1(138.786,67.285) ; FPC_7725.19 138.37,73.034 v1(138.379,73.025)
"DCMI VSYNC": *.93 FPC_7725.18 FPC_MT9.7 | length 14.7
  Top Layer w0.152: FPC_MT9.7 138.876,68.134 139.497,67.513 139.497,67.285 v1(139.471,67.259) ; v1(139.37,63.424) 139.384,63.409 *.93
  Bottom Layer w0.152: v1(138.862,73.635) 138.87,73.643 FPC_7725.18 ; v1(139.37,63.424) 139.37,67.091 139.471,67.192 v1(139.471,67.259)
DGND: C4.2 C7.2 C17.2 C18.2 FPC_7725.2 FPC_7725.10 FPC_7725.23 FPC_MT9.2 FPC_MT9.15 R23.2 V1.1 V2.1 | length 58.6
  Top Layer w0.254: C17.2 127.219,73.076 135.89,73.076 v1(136.373,73.558) 136.376,73.562 FPC_MT9.2 ; v1(142.85,76.733) v1(142.85,75.717) 142.85,74.701 FPC_MT9.15 ; v1(156.818,73.405) 156.818,73.006 156.769,72.957 C7.2
  Top Layer w0.508: C17.2 126.999,72.483 126.999,69.346 V2.1 ; R23.2 154.798,64.118 157.258,66.577 157.258,72.468 C7.2
  Bottom Layer w0.254: v1(136.373,73.558) 136.371,73.56 136.371,74.681 FPC_7725.23 136.37,76.07 136.931,76.632 148.26,76.632 150.839,74.052 156.171,74.052 v1(156.818,73.405) ; FPC_7725.10 142.86,74.693 142.86,75.707 v1(142.85,75.717) 146.66,75.717 146.847,75.53 146.847,74.705 FPC_7725.2
GND: *.10 *.19 *.26 *.36 *.49 *.74 *.99 C1.1 C2.1 C3.2 C5.1 C6.1 C8.1 C9.2 C10.2 C11.1 C12.1 C13.2 C14.1 C15.2 C16.2 C19.1 C20.2 J1.1 J3.A1 J3.A12 J3.B1 J3.B12 J4.1 R2.2 R23.1 S1.1 SD1.6 SD1.10 SWD2.1 U1.2 U2.2 XTAL1.2 | length 4.6
  Top Layer w0.254: 135.063,63.482 135.172,63.373 135.861,63.373 136.243,62.991 v1(136.282,62.991) 136.384,62.889 *.99 ; C3.2 v1(153.805,59.88) C2.1@153.805,60.63
  other v1: 138.303,40.081 144.196,44.247 150.546,45.872 136.042,53.823 131.284,55.3 149.327,60.554 133.807,61.417 149.437,62.299 145.872,62.967 147.345,62.967 133.34,63.115 134.671,63.754 134.493,66.294 133.02,67.005
  other v2: 128,36 130,36 136,36 146,36 148,36 150,36 154,36 129,38 131,38 135,38 145,38 153,38 126,40 128,40 154,40 156,40 129,42 127,46 149,46 126,48 152,48 154,48 151,50 142,52 144,52 148,52 127,54 147,54 129,58 141,58 143,58 147,58 155,58 157,58 156,60 130,68 132,68 134,68 148,68 150,68 148,72 129,74 135,74 149,74 157,74 130,76 132,76 150,76 154,76 129,78 131,78 149,78 153,78
I2C1_SCL: *.95 FPC_7725.20 FPC_MT9.5 R3.1 | length 14.6
  Top Layer w0.152: FPC_MT9.5 137.876,67.432 v1(138.049,67.259) ; v1@138.053,63.784 138.384,63.453 *.95
  Bottom Layer w0.152: FPC_7725.20 137.87,73.585 v1(137.871,73.584) ; v1(138.049,63.779) v1(138.049,67.259)
I2C1_SDA: *.96 FPC_7725.22 FPC_MT9.3 R4.2 | length 17.3
  Top Layer w0.152: R4.2 135.72,64.33 136.525,63.525 137.609,63.525 137.884,63.25 *.96 ; v1(136.347,67.183) 136.876,67.712 FPC_MT9.3
  Bottom Layer w0.152: v1(136.322,63.703) 136.322,67.158 v1(136.347,67.183) ; FPC_7725.22 136.87,73.112 v1(136.881,73.101)
I2C2_SCL: *.46 J2.4 | length 23.9
  Top Layer w0.152: v1(139.045,44.851) 139.203,45.009 145.691,45.009 145.884,45.203 *.46
  Bottom Layer w0.152: J2.4@125.12,49.403 125.374,49.403 128.854,45.923 137.922,45.923 138.994,44.851 v1(139.045,44.851)
I2C2_SDA: *.47 J2.3 | length 23.7
  Top Layer w0.152: v1(138.405,44.425) 138.407,44.423 139.52,44.423 139.802,44.704 145.886,44.704 146.384,45.203 *.47
  Bottom Layer w0.152: J2.3@125.12,46.863 126.721,45.263 137.566,45.263 v1(138.405,44.425)
"LED B": *.17 R5.1 | length 8.8
  Top Layer w0.254: R5.1 v1@131.934,58.556 ; v1(131.851,51.943) 132.02,51.774 133.345,51.774 133.345,51.837 ; 133.339,51.831 133.345,51.837 ; 133.345,51.837 133.349,51.841 133.345,51.846 133.345,51.837
  Bottom Layer w0.254: v1(131.851,51.943) 131.851,58.369 v1@131.928,58.445
  other v1: 131.978,58.511
"LED G": *.16 R7.1 | length 10.5
  Top Layer w0.254: R7.1 131.88,60.114 v1(131.894,60.1) ; v1(132.551,52.254) 132.623,52.325 134.332,52.325 *.16
  Bottom Layer w0.254: v1(131.894,60.1) 132.56,59.434 132.56,52.262 v1(132.551,52.254)
"LED R": *.15 R1.2 | length 11
  Top Layer w0.254: R1.2 131.953,61.672 v1(131.978,61.646) ; v1@133.156,52.822 *.15
  Bottom Layer w0.254: v1@132.004,61.62 133.121,60.503 v1(133.121,52.857)
Net*_12: *.12 XTAL1.1 | length 4.2
  Top Layer w0.254: XTAL1.1 130.373,54.367 130.664,54.367 130.708,54.322 *.12
Net*_13: *.13 XTAL1.3 | length 5.1
  Top Layer w0.152: XTAL1.3 XTAL1.3@130.566,52.14
  Top Layer w0.254: XTAL1.3@130.566,52.14 130.7,52.14 131.496,52.935 131.496,53.442 131.877,53.822 *.13
Net*_20: *.20 *.21 C9.1 C10.1 L1.2 | length 7
  Top Layer w0.254: C9.1 C10.1 L1.2 131.584,49.822 *.21 *.20
Net*_48: *.48 C13.1 | length 3.1
  Top Layer w0.152: C13.1 145.753,43.713 146.884,44.844 *.48
Net*_73: *.73 C3.1 | length 2.8
  Top Layer w0.254: *.73 152.236,58.822 C3.1@152.265,58.852
NetC19_2: C19.2 U1.4 | length 1.9
  Top Layer w0.508: U1.4 136.827,41.331 137.272,41.776 137.297,41.776 137.508,41.987 C19.2
NetR1_1: R1.1 RGB1.3 | length 5.4
  Top Layer w0.254: RGB1.3 127.659,65.33 128.829,64.16 128.829,62.696 129.828,61.697 R1.1
NetR5_2: R5.2 RGB1.1 | length 6.5
  Top Layer w0.254: RGB1.1 125.608,61.957 125.608,61.387 126.153,60.842 127.542,60.842 R5.2
NetR7_2: R7.2 RGB1.2 | length 8.2
  Top Layer w0.254: RGB1.2 125.324,65.241 125.324,64.313 125.806,63.83 127.635,63.83 128.143,63.322 128.143,61.824 129.828,60.139 R7.2
NRST: *.14 C8.2 J1.8 R11.2 S1.2 | length 62.7
  Top Layer w0.152: v1(155.905,47.346) 155.905,58.191 J1.8@157.277,59.563
  Top Layer w0.254: C8.2 131.292,41.212 S1.2 131.813,40.691 132.969,40.691 v1(132.994,40.716) 132.994,45.125 135.839,47.97 135.839,52.883 135.408,53.314 134.343,53.314 *.14
  Bottom Layer w0.152: v1(132.994,40.716) 134.417,40.716 135.687,39.446 140.932,39.446 141.275,39.789 141.275,41.935 142.037,42.697 154.102,42.697 155.905,44.501 v1(155.905,47.346)
P_IN: J1.2 V3.2 | length 16.1
  Top Layer w0.762: v1(142.519,42.088) 142.519,42.443 142.57,42.494 142.519,42.545 142.672,42.697
  Bottom Layer w0.762: v1(142.519,42.088) 154.964,42.088 J1.2
PB12: *.51 J2.5 J4.7 | length 73.8
  Top Layer w0.152: v1(130.101,76.782) 130.101,77.904 131.318,79.121 146.507,79.121 147.625,78.003 J4.7 ; v1(136.456,48.932) 138.494,48.932 139.604,47.822 *.51
  Bottom Layer w0.152: J2.5@125.12,51.943 126.822,50.241 135.147,50.241 v1(136.456,48.932) ; J2.5 124.206,53.135 124.206,70.891 130.097,76.782 v1(130.101,76.782)
PB13: *.52 J2.6 J4.3 | length 57.2
  Top Layer w0.152: v1(136.462,49.71) 138.631,49.71 140.019,48.322 *.52
  Bottom Layer w0.152: J2.6@125.278,54.326 J2.6 ; v1(136.462,49.71) 135.448,50.724 129.157,50.724 J2.6 ; J4.3 137.456,77.868 137.024,77.868 135.941,76.784 134.62,76.784 124.511,66.675 124.511,55.37 J2.6
PB14: *.53 J2.7 | length 27.7
  Top Layer w0.152: v1(136.451,50.569) 138.712,50.569 140.458,48.822 *.53
  Bottom Layer w0.152: J2.7@125.12,57.023 131.031,51.112 135.806,51.112 136.349,50.569 v1(136.451,50.569)
PB15: *.54 J2.8 J4.4 | length 56.4
  Top Layer w0.152: v1(136.449,51.41) 138.786,51.41 140.873,49.322 *.54
  Bottom Layer w0.152: J2.8@125.12,59.563 125.197,59.563 128.041,56.718 128.041,54.915 131.539,51.417 136.441,51.417 v1(136.449,51.41) ; J2.8 125.556,67.059 134.772,76.276 136.017,76.276 136.728,76.987 137.96,76.987 138.976,78.003 J4.4
PD12: *.59 J1.3 J4.5 | length 47
  Top Layer w0.152: v1(151.693,66.346) 151.693,78.824 v1(151.806,78.937)
  Top Layer w0.254: *.59 152.228,51.822 154.053,49.997 v1(154.073,49.997)
  Bottom Layer w0.152: J4.5 142.672,78.212 143.441,78.982 151.76,78.982 v1(151.806,78.937) ; v1(151.693,66.346) 151.693,64.083 152.203,63.573 v1(152.203,51.758)
  Bottom Layer w0.254: v1(154.073,49.997) 154.143,49.997 J1.3@157.277,46.863
PD13: *.60 J1.4 J4.6 | length 37.8
  Top Layer w0.152: J4.6 146.101,78.003 150.589,73.515 v1(150.589,66.325)
  Top Layer w0.254: *.60@149.435,52.323 v1(151.451,52.323) 153.01,52.323 154.061,51.272 v1(154.186,51.272)
  Bottom Layer w0.152: v1(150.589,66.325) 150.589,57.843 151.457,56.975 151.457,52.329 v1(151.451,52.323)
  Bottom Layer w0.254: v1(154.186,51.272) 156.054,49.403 J1.4@157.277,49.403
PD14: *.61 J1.5 | length 8.2
  Top Layer w0.254: *.61 154.194,52.822 v1(154.203,52.832)
  Bottom Layer w0.254: v1(154.203,52.832) 156.388,52.832 J1.5@157.277,51.943
SD_CD: *.81 R17.2 SD1.9 | length 18.1
  Top Layer w0.152: R17.2 144.763,65.939 145.542,65.159 145.542,63.602 145.384,63.444 *.81 145.387,61.37 145.387,57.53 v1(145.39,57.528)
  Bottom Layer w0.152: v1(145.39,57.528) 145.39,53.884 147.827,51.446 SD1.9
SDIO_CLK: *.80 SD1.5 | length 13.5
  Top Layer w0.152: v1(145.872,57.937) 145.884,57.95 *.80
  Bottom Layer w0.152: SD1.5 143.427,53.257 144.849,54.679 144.849,57.615 145.191,57.956 145.853,57.956 v1(145.872,57.937)
SDIO_CMD: *.83 R14.2 SD1.3 | length 16.5
  Top Layer w0.152: v1(144.344,57.528) 144.364,57.548 144.364,61.352 *.83 144.384,63.977 R14.2
  Bottom Layer w0.152: SD1.3 141.227,52.53 144.344,55.647 v1(144.344,57.528)
SDIO_D0: *.65 R15.2 SD1.7 | length 12
  Top Layer w0.152: v1(145.647,52.147) 145.647,53.925 146.545,54.822 *.65
  Top Layer w0.254: *.65 151.366,54.822 152.265,53.924 R15.2
  Bottom Layer w0.152: SD1.7 145.627,52.126 v1(145.647,52.147)
SDIO_D1: *.66 R16.2 SD1.8 | length 13.6
  Top Layer w0.152: v1(145.027,53.522) 145.027,54.526 145.823,55.322 *.66
  Top Layer w0.254: *.66 152.088,55.322 R16.2
  Bottom Layer w0.152: v1(145.027,53.522) 146.727,51.821 SD1.8
SDIO_D2: *.78 R12.2 SD1.1 | length 19.6
  Top Layer w0.152: v1(146.904,59.055) 146.884,59.075 *.78 146.884,64.139 R12.2
  Bottom Layer w0.152: SD1.1 139.027,51.651 143.154,55.778 143.154,57.506 144.704,59.055 v1(146.904,59.055)
SDIO_D3: *.79 R13.2 SD1.2 | length 20.7
  Top Layer w0.152: v1(146.354,58.511) 146.354,61.325 146.345,61.334 *.79 146.384,63.394 146.177,63.602 146.177,65.066 147.05,65.939 R13.2
  Bottom Layer w0.152: SD1.2 140.127,52.141 143.764,55.778 143.764,57.554 144.721,58.511 v1(146.354,58.511)
SPI3_MISO: *.90 FPC_MT9.4 | length 16.2
  Top Layer w0.152: FPC_MT9.4 137.376,67.272 137.897,66.751 140.31,66.751 140.884,66.176 *.90
SPI3_MOSI: *.91 FPC_MT9.23 | length 18.8
  Top Layer w0.152: *.91 140.384,63.422 v1(140.411,63.449) ; FPC_MT9.23 146.882,74.669 146.882,73.209 v1(146.888,73.203)
  Bottom Layer w0.152: v1(140.411,63.449) 140.411,66.446 140.995,67.031 140.995,68.961 141.376,69.342 146.177,69.342 146.888,70.053 v1(146.888,73.203)
SPI3_SCLK: *.89 FPC_MT9.24 | length 18.5
  Top Layer w0.152: *.89 141.384,65.489 v1(141.402,65.507) ; FPC_MT9.24 147.386,74.665 147.386,72.705 v1(147.396,72.695)
  Bottom Layer w0.152: v1(141.402,65.507) 141.402,68.529 141.808,68.936 146.38,68.936 147.32,69.875 147.32,72.619 v1(147.396,72.695)
SPI3_SSEL: *.77 FPC_MT9.1 | length 28.9
  Top Layer w0.152: v1(135.153,62.484) 135.153,60.604 136.34,59.418 v1(143.087,59.418) ; v1(135.661,73.584) 135.876,73.798 FPC_MT9.1 ; v1(147.371,59.665) 147.384,59.678 *.77
  Bottom Layer w0.152: v1(135.153,62.484) 135.153,67.377 135.664,67.888 135.664,73.581 v1(135.661,73.584) ; v1(143.087,59.418) 143.334,59.665 v1(147.371,59.665)
SWCLK: *.76 J1.10 SWD2.3@153.227,70.919 | length 19.6
  Top Layer w0.254: *.76 151.136,61.372 151.409,61.646 154.381,61.646 157.277,64.541 J1.10@157.277,64.643
  Bottom Layer w0.254: SWD2.3@153.227,70.919 155.296,68.85 155.296,64.846 155.656,64.486 J1.10
SWDIO: *.72 J1.9 SWD2. | length 21.1
  Top Layer w0.254: *.72 154.588,58.322 154.915,58.649 154.915,61.112 155.905,62.103 J1.9@157.277,62.103
  Bottom Layer w0.254: SWD2. 153.372,69.669 154.661,68.38 154.661,62.916 155.631,61.946 J1.9
USB_DM: *.70 J3.A7 J3.B7 | length 27.2
  Top Layer w0.254: J3.B7 147.764,42.328 147.955,42.52 148.717,42.52 148.764,42.566 ; J3.A7 148.764,42.566 ; *.70 153.929,57.322 154.838,56.413 154.838,45.593 152.146,42.901 149.098,42.901 148.764,42.566
USB_DP: *.71 J3.A6 J3.B6 | length 30
  Top Layer w0.254: J3.A6 148.264,39.925 148.412,39.776 149.115,39.776 149.264,39.925 J3.B6 149.25,41.351 149.25,42.342 149.403,42.494 152.451,42.494 155.346,45.39 155.346,56.667 154.191,57.822 *.71
VIN: *.68 C15.1 R8.1 RGB1.4 U1.1 U1.3 U2.1 U2.3 | length 62
  Top Layer w0.254: RGB1.4 126.887,62.382 v1(127.66,62.382) ; v1(141.224,56.134) 141.264,56.134 141.452,56.322 *.68
  Top Layer w0.508: U2.1 129.225,65.855 129.523,65.557 v1(131.191,65.557) 131.129,65.619 131.129,66.77 U2.3 ; v1(135.941,56.337) 136.144,56.134 v1(141.224,56.134) ; U1.3 139.631,40.367 v1(140.592,40.367) 140.634,40.367 141.021,39.98 141.021,38.768 140.723,38.471 U1.1 139.627,37.382 140.174,36.835 C15.1 140.174,36.43 140.485,36.119 R8.1
  Bottom Layer w0.254: v1(127.66,62.382) v1@127.737,62.459
  Bottom Layer w0.508: v1(127.66,62.382) 131.216,62.382 ; v1(131.191,65.557) 131.216,65.532 131.216,62.382 ; v1(135.941,56.337) 135.738,56.54 135.738,60.731 134.087,62.382 131.216,62.382 ; v1(140.592,40.367) 140.592,45.158 138.32,47.43 138.32,52.113 141.249,55.042 141.249,56.109 v1(141.224,56.134)
pads on no net: *.1 *.2 *.7 *.8 *.9 *.18 *.22 *.23 *.24 *.25 *.31 *.32 *.33 *.34 *.35 *.37 *.38 *.39 *.40 *.41 *.42 *.43 *.44 *.45 *.55 *.56 *.57 *.58 *.62 *.82 *.84 *.85 *.86 *.87 FPC_7725.24 FPC_7725.25 FPC_7725.26 FPC_MT9.10 FPC_MT9.25 FPC_MT9.26 J3.0 J3.1 J3.A5 J3.A8 J3.B5 J3.B8 SD1.0 SD1.11 SD1.12 SD1.13 U2.4

## Polygon pours and split planes (outlines as drawn)
GND on Top Layer "GND_L01_P000" (solid, pour order 0): 123.698,79.502 158.698,79.502 158.698,34.869 123.698,34.869
GND on Bottom Layer "GND_L02_P001" (solid, pour order 1): 123.647,79.756 123.901,79.502 158.698,79.502 158.698,35.127 158.44,34.869 123.698,34.869 123.698,79.502

## Keep-outs
Keep-Out Layer:
  circle w0.152: c155.955,76.759 r1.5
  circle w0.152: c155.955,37.612 r1.5
  circle w0.152: c126.493,37.648 r1.5
  circle w0.152: c126.441,76.759 r1.5
  lines w0.152: 123.698,34.869 123.698,79.502 158.698,79.502 158.698,34.869 123.698,34.869
  lines w0.3: 123.698,34.869 123.698,79.502 158.698,79.502 158.698,34.869 123.698,34.869

## Silkscreen, mask and mechanical layers (free items; w line width, h text height)
Top Overlay:
  text "GND" at 130.819,75.647 h1.52
  text "3V3" at 134.059,75.647 h1.52
  text "P2" at 137.042,75.647 h1.52
  text "P0" at 139.582,75.647 h1.52
  text "P7" at 142.122,75.647 h1.52
  text "P8" at 144.634,75.647 h1.52
  text "P3" at 147.202,75.647 h1.52
  text "3V3" at 149.426,75.647 h1.52
Bottom Overlay:
  text "酷世DIY" at 132.639,70.739 h2.03
  text "KSMV" at 130.937,68.961 h2.03
  text "CLK" at 155.55,63.932 h1.52
  text "x" at 131.293,63.119 h10
  text "DIO" at 155.55,61.392 h1.52
  text "P0" at 129.007,58.852 h1.52
  text "RST" at 155.55,58.852 h1.52
  text "P1" at 129.018,56.312 h1.52
  text "BOOT0" at 155.55,56.312 h1.52
  text "P2" at 129.018,53.772 h1.52
  text "3V3" at 155.55,53.645 h1.52
  text "P3" at 129.007,51.232 h1.52
  text "P9" at 155.55,51.232 h1.52
  text "P4" at 129.018,48.692 h1.52
  text "P8" at 155.55,48.692 h1.52
  text "P5" at 129.018,46.152 h1.52
  text "P7" at 155.55,46.152 h1.52
  text "P6" at 129.007,43.612 h1.52
  text "VIN" at 155.55,43.612 h1.52
  text "3V3" at 129.322,41.072 h1.52
  text "GND" at 155.423,41.072 h1.52
Mechanical 1:
  the board outline again, w0.1

## Text inside footprints (layer, text, board x,y; h text height)
J3: Top Overlay "USB" at 146.736,37.643 h1.27